# EAGLE board untitled (EAGLE 9.4.2)
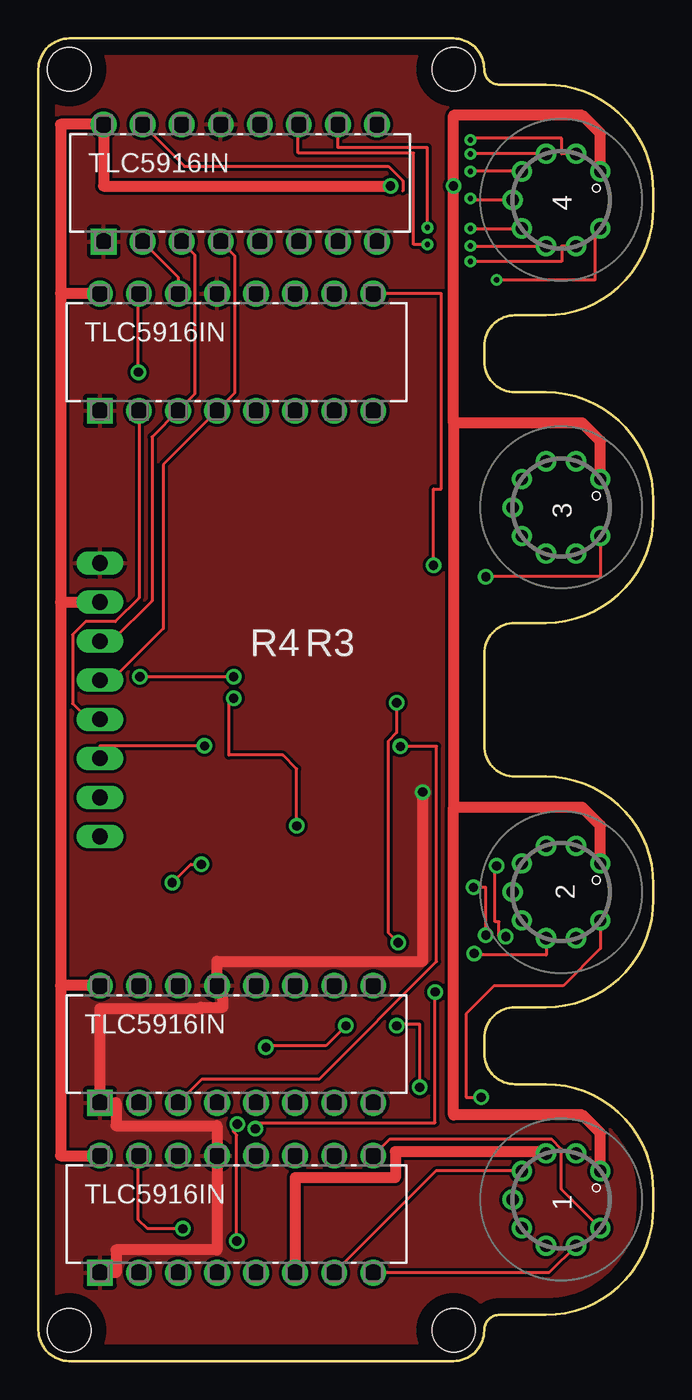
[diagram p0: board, top side]
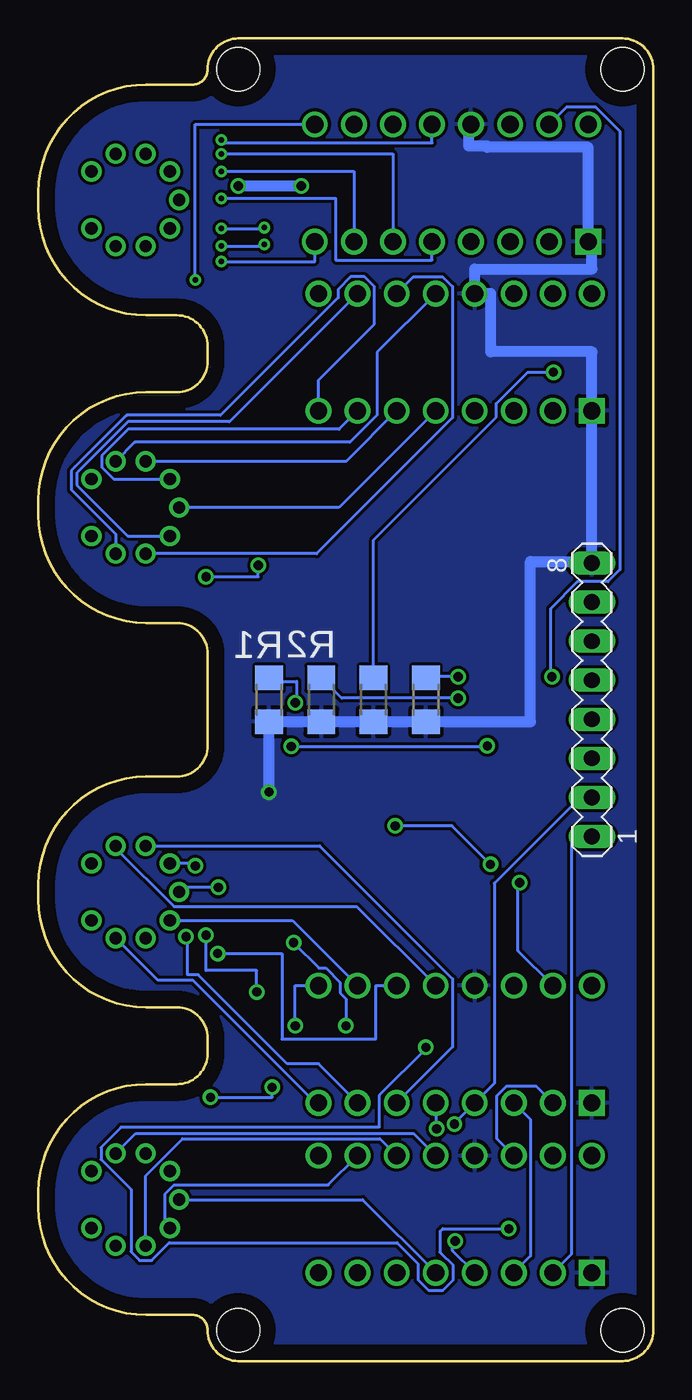
[diagram p1: board, bottom side, seen from below]

Size 40 x 86 mm. Coordinates in mm from the lower left corner, seen from the top.
Outline: 33,83 arc-90 40,76 40,75 arc-90 33,68 31,68 arc90 29,66 29,65 arc90 31,63 33,63 arc-90 40,56 40,55 arc-90 33,48 31,48 arc90 29,46 29,40 arc90 31,38 33,38 arc-90 40,31 40,30 arc-90 33,23 31,23 arc90 29,21 29,20 arc90 31,18 33,18 arc-90 40,11 40,10 arc-90 33,3 30,3 arc90 29,2 arc-90 27,0 2,0 arc-90 0,2 0,84 arc-90 2,86 27,86 arc-90 29,84 arc90 30,83 33,83
Copper layers (1*16): Top 0.035mm / dielectric 1.5mm / Bottom 0.035mm
Design rules "default": minimum track width 6mil, minimum drill 0.35mm, track to track 6mil, track to pad 6mil, pad to pad 6mil, via to via 6mil, smd to smd 6mil, copper to edge 40mil, drill to drill 6mil, minimum pad ring 10mil, minimum via ring 8mil, stop-mask expansion 4mil, vias tented up to drill 0mil, thermal gap 10mil
Net classes: 0 default: width 0.2 mm, drill 0.6 mm, clearance 0.2 mm; 1 other: width 0.2 mm, drill 0.2 mm, clearance 0.1 mm
Holes 2.8 mm at 2,84 27,84 27,2 2,2
tKeepout: area 8.5,52.2 to 8.5,53.4; area 8.5,51.8 to 8.6,53.8; area 8.6,51.6 to 8.6,54; area 8.6,53.2 to 8.6,54.2; area 8.6,51.4 to 8.6,52.5; area 8.6,53.7 to 8.7,54.4; area 8.6,51.3 to 8.7,51.9; area 8.7,53.9 to 8.7,54.4; area 8.7,51.2 to 8.7,51.7; area 8.7,54.1 to 8.8,54.5; area 8.7,51.1 to 8.8,51.5; area 8.8,54.3 to 8.8,54.6; 2068 more areas

## Footprints (pad centres in the part's own frame; a part is rotated, then mirrored left to right if it is on the bottom)
IV-9 = drill 0.8: 1 1.854,-2.552; 2 3,-0.975; 3 3,0.975; 4 1.854,2.552; 5 0,3.154; 6 -1.854,2.552; 7 -3,0.975; 8 -3,-0.975; 9 -1.854,-2.552
DIP254P762X508-16 = drill 1.118 pad 1.676 square: 1 -7.62,17.78 | drill 1.118 pad 1.676: 2 -7.62,15.24; 3 -7.62,12.7; 4 -7.62,10.16; 5 -7.62,7.62; 6 -7.62,5.08; 7 -7.62,2.54; 8 -7.62,0; 9 0,0; 10 0,2.54; 11 0,5.08; 12 0,7.62; 13 0,10.16; 14 0,12.7; 15 0,15.24; 16 0,17.78
R1206 = smd 1.6 x 1.803: 1 -1.422,0; 2 1.422,0
MA08-1 = drill 1.016 long: 1 -8.89,0; 2 -6.35,0; 3 -3.81,0; 4 -1.27,0; 5 1.27,0; 6 3.81,0; 7 6.35,0; 8 8.89,0

## Placement (x,y rotation side)
1  IV-9  [IV-9]  34,10.5 90 top
2  IV-9  [IV-9]  34,30.5 90 top
3  IV-9  [IV-9]  34,55.5 90 top
4  IV-9  [IV-9]  34,75.5 90 top
IC2  TLC5916IN  [DIP254P762X508-16]  21.78,24.41 90 top
IC3  TLC5916IN  [DIP254P762X508-16]  21.78,69.41 90 top
IC4  TLC5916IN  [DIP254P762X508-16]  21.78,13.36 90 top
IC5  TLC5916IN  [DIP254P762X508-16]  22.02,80.41 90 top
R1  1K  [R1206]  25,43 90 bottom
R2  1K  [R1206]  21.6,43 90 bottom
R3  1K  [R1206]  18.2,43 90 bottom
R4  1K  [R1206]  14.8,43 90 bottom
SV1  [MA08-1]  4,43 90 bottom

## Library data of the parts
1-4 = domestichacks
IC2-IC5 = TLC5916IN; DESCRIPTION: 8-CHANNEL CONSTANT-CURRENT LED SINK DRIVERS; HEIGHT: mm; MANUFACTURER_NAME: Texas Instruments; MANUFACTURER_PART_NUMBER: TLC5916IN; MOUSER_PART_NUMBER: 595-TLC5916IN; MOUSER_PRICE-STOCK: https://www.mouser.com/Search/Refine.aspx?Keyword=595-TLC5916IN
R1-R4 = rcl; SPICEPREFIX: R
SV1 = con-lstb; OC_FARNELL: unknown; OC_NEWARK: unknown

## Nets
3.3V: 1.1 2.1 3.1 4.1 IC2.16 IC3.16 IC4.16 IC5.16 SV1.7
CLK1 [other]: IC2.3 IC4.3 SV1.3
CLK2 [other]: IC3.3 IC5.3 SV1.6
GND: IC2.1 IC2.13 IC3.1 IC3.13 IC4.1 IC4.13 IC5.1 IC5.13 R1.1 R2.1 R3.1 R4.1 SV1.8
LE1 [other]: IC2.4 IC4.4 SV1.2
LE2 [other]: IC3.4 IC5.4 SV1.5
N$7 [other]: IC3.14 IC5.2
N$9 [other]: IC2.2 IC4.14
N$13 [other]: 2.8 IC2.8
N$15 [other]: 1.5 IC4.5
N$16 [other]: 1.3 IC4.6
N$17 [other]: 1.4 IC4.7
N$18 [other]: 1.8 IC4.8
N$19 [other]: 1.9 IC4.9
N$20 [other]: 1.6 IC4.10
N$21 [other]: 1.7 IC4.11
N$22 [other]: 3.5 IC3.5
N$23 [other]: 3.3 IC3.6
N$24 [other]: 3.4 IC3.7
N$25 [other]: 3.6 IC3.10
N$26 [other]: 3.7 IC3.11
N$27 [other]: 3.2 IC3.12
N$28 [other]: 4.5 IC5.5
N$29 [other]: 4.3 IC5.6
N$30 [other]: 2.9 IC2.9
N$31 [other]: 3.8 IC3.8
N$32 [other]: 3.9 IC3.9
N$35 [other]: 4.8 IC5.8
N$36 [other]: 4.9 IC5.9
N$66 [other]: 1.2 IC4.12
N$67 [other]: 2.5 IC2.5
N$68 [other]: 2.3 IC2.6
N$69 [other]: 2.4 IC2.7
N$70 [other]: 2.6 IC2.10
N$71 [other]: 2.7 IC2.11
N$72 [other]: 2.2 IC2.12
N$73 [other]: 4.4 IC5.7
N$74 [other]: 4.6 IC5.10
N$75 [other]: 4.7 IC5.11
N$76 [other]: 4.2 IC5.12
R-EXT1: IC4.15 R1.2
R-EXT2: IC2.15 R2.2
R-EXT3: IC3.15 R3.2
R-EXT4: IC5.15 R4.2
SDI1 [other]: IC4.2 SV1.1
SDI2 [other]: IC3.2 SV1.4

## Tracks (layer width: path | path; a pad name or v marks a point on that pad's centre or on a via)
3.3V  (via drill 0.6)
  Top 0.7: IC3.16 1.44,69.41 | 1.44,69.41 1.44,80.41 IC5.16 4.24,76.4 v22.9,76.4 | 1.44,69.41 1.44,49.35 | 1.44,49.35 SV1.7 | 1.44,49.35 1.44,24.41 | IC2.16 1.44,24.41 | 1.44,24.41 1.44,13.36 IC4.16 | 27,61 v27,76.4 27,81 35.38,81 36.55,79.83 4.1 | 27,61 27,36 | 27,36 27,16 35.38,16 36.55,14.83 1.1 | 27,61 35.38,61 36.55,59.83 3.1 | 27,36 35.38,36 36.55,34.83 2.1
  Bottom 0.7: v22.9,76.4 v27,76.4
CLK1  (via drill 0.6)
  Top 0.2: IC2.3 10.61,18.33 18.25,18.33 25.9,25.98 25.9,39.97 v23.55,39.97 | v10.8,40 4,40 SV1.3
  Bottom 0.2: IC2.3 7.99,15.7 7.99,6.83 IC4.3 | v23.55,39.97 10.8,39.97 v10.8,40
CLK2
  Top 0.2: SV1.6 4.76,46.81 7.38,49.43 7.38,60.09 IC3.3 10.17,62.88 10.17,71.94 IC5.3
GND  (via drill 0.6)
  Top 0.7: IC4.1 5.05,5.74 5.05,7.23 11.62,7.23 IC4.13 11.62,15.3 5.05,15.3 5.05,16.79 IC2.1 4,22.92 10.57,22.92 10.57,23 12,23 12,24.41 IC2.13 11.62,26 25,26 v25,37
  Bottom 0.2: R3.1 16.5,41.58 | R4.1 16.1,41.58 | R2.1 19.9,41.58
  Bottom 0.7: v25,37 R1.1 19.9,41.58 16.5,41.58 16.1,41.58 8,41.58 8,52 4,52 SV1.8 IC3.1 4,65.62 10.57,65.62 10.57,69.41 IC3.13 11.62,71 4,71 4,72.79 IC5.1 4.24,78.92 10.81,78.92 10.81,79 12,79 12,80.41 IC5.13
  pour Bottom: 0,0 40,0 40,15 40,45 40,86 0,86
  pour Top: 0,0 40,0 40,17 40,85 arc90 39,86 0,86
LE1  (via drill 0.6)
  Top 0.2: v12.9,7.8 12.9,14.7 12.7,14.9 12.7,15.16 v12.94,15.41
  Bottom 0.2: 13.01,15.41 IC2.4 10.35,18.06 10.35,31.06 4.76,36.65 SV1.2 | IC4.4 13.06,7.18 13.06,7.64 v12.9,7.8 | v12.94,15.41 13.01,15.41 | 13.01,15.41 13.06,15.36
LE2
  Top 0.2: SV1.5 4.76,44.27 8.12,47.63 8.12,58.29 IC3.4 12.76,62.93 12.76,71.89 IC5.4
N$7
  Top 0.2: IC5.2 9.08,70.49 IC3.14
N$9
  Bottom 0.2: IC4.14 10.17,14.45 10.17,17.25 9.53,17.88 7.63,17.88 IC2.2
N$13
  Bottom 0.2: 2.8 32.24,24.77 29.96,24.77 21.98,16.79 IC2.8
N$15
  Bottom 0.2: 1.5 18.92,10.5 IC4.5
N$16
  Top 0.7: 1.3 32.71,13.5 32.71,13.61 23.22,13.61 23.22,11.92 16.7,11.92 IC4.6
N$17
  Top 0.2: 1.4 25.85,12.35 IC4.7
N$18
  Top 0.2: 1.8 33.22,5.74 IC4.8
N$19
  Top 0.2: 1.9 34.03,11.17 34.03,13.78 33.4,14.41 22.83,14.41 IC4.9
N$20
  Bottom 0.2: 1.6 31.75,8.95 31.75,10.88 31.18,11.45 21.15,11.45 IC4.10
N$21
  Bottom 0.2: 1.7 33.02,12.06 30.63,14.45 17.79,14.45 IC4.11
N$22
  Bottom 0.2: IC3.5 20.45,55.5 3.5
N$23
  Bottom 0.2: IC3.6 19.99,58.5 3.3
N$24
  Bottom 0.2: IC3.7 20.44,60.59 34.16,60.59 35.88,58.88 35.88,58.12 35.11,57.35 3.4
N$25
  Bottom 0.2: IC3.10 27.57,61.08 34.18,61.08 37.51,57.75 37.51,56.96 34.19,53.65 3.6
N$26
  Bottom 0.2: IC3.11 15.61,70.5 13.71,70.5 13.07,69.86 13.07,61.34 21.91,52.5 3.7
N$27
  Bottom 0.2: IC3.12 17.97,65.6 17.97,61.52 19.74,59.74 33.73,59.74 3.2
N$28  (via drill 0.35)
  Top 0.2: 4.5 28.1,75.5 v28.1,75.6
  Bottom 0.2: v28.1,75.6 20.67,75.6 20.67,71.6 14.4,71.6 IC5.5
N$29  (via drill 0.35)
  Top 0.2: 4.3 v28.1,78.5 v28.1,78.49
  Bottom 0.2: v28.1,78.49 16.94,78.49 IC5.6
N$30  (via drill 0.6)
  Top 0.2: 2.9 36.55,26.82 34.13,24.4 29.64,24.4 27.81,22.57 27.81,17.15 v28.8,17.15 | v24.8,17.8 24.8,21.9 23.3,21.9 v23.3,21.8
  Bottom 0.2: v28.8,17.15 24.8,17.15 v24.8,17.8 | v23.3,21.8 23.3,24.41 IC2.9
N$31
  Bottom 0.2: IC3.8 21.78,63.8 18.15,67.43 18.15,69.86 18.79,70.5 19.69,70.5 20.51,69.68 20.51,69.14 28.16,61.49 34.26,61.49 37.86,57.9 37.86,56.65 34.98,53.77 3.8
N$32  (via drill 0.6)
  Top 0.2: 3.9 36.55,51 v29.1,51 | v25.7,51.74 25.7,56.7 26.2,56.7 26.2,69.41 IC3.9
  Bottom 0.2: v29.1,51 25.7,51 v25.7,51.74
N$35  (via drill 0.35)
  Top 0.2: 4.8 34.03,72.5 34.03,71.49 v28.1,71.49
  Bottom 0.2: v28.1,71.49 22.02,71.49 IC5.8
N$36  (via drill 0.35)
  Top 0.2: 4.9 36.2,73.65 36.2,70.3 v29.8,70.3
  Bottom 0.2: IC5.9 29.8,80.41 v29.8,70.3
N$66
  Bottom 0.2: 1.2 33.67,14.8 15.6,14.8 IC4.12
N$67  (via drill 0.6)
  Top 0.2: v14.1,15.1 14.1,15.5 25.8,15.5 v25.8,24 | v28.3,30.8 29.1,30.8 v29.1,27.7
  Bottom 0.2: IC2.5 14.16,15.1 v14.1,15.1 | v25.8,24 25.8,25.4 29.1,25.4 v29.1,27.7 | v28.3,30.8 30.85,30.8 2.5
N$68
  Bottom 0.2: 2.3 21.7,33.5 13.07,24.86 13.07,20.42 IC2.6
N$69  (via drill 0.6)
  Top 0.2: v30.4,27.6 29.96,27.6 29.96,28.56 29.7,28.56 29.7,32.2 v29.8,32.2
  Bottom 0.2: IC2.7 21.78,19.33 23.82,19.33 29.6,25.12 30.3,25.12 30.3,27.6 v30.4,27.6 | v29.8,32.2 29.8,32.35 2.4
N$70
  Bottom 0.2: 2.6 23.47,28.65 IC2.10
N$71  (via drill 0.6)
  Top 0.2: 2.7 33.02,26.4 28.34,26.4 v28.34,26.5
  Bottom 0.2: IC2.11 18.05,24.41 18.05,20.94 24.16,20.94 24.16,26.5 v28.34,26.5
N$72
  Bottom 0.2: 2.2 34.98,33.35 31.18,29.55 19.3,29.55 IC2.12
N$73  (via drill 0.35)
  Top 0.2: 4.4 v28.1,77.35
  Bottom 0.2: v28.1,77.35 19.48,77.35 IC5.7
N$74  (via drill 0.35)
  Top 0.2: v25.3,73.7 25.3,78.9 19.48,78.9 IC5.10 | v28.1,73.65 4.6
  Bottom 0.2: v28.1,73.65 25.3,73.65 v25.3,73.7
N$75  (via drill 0.35)
  Top 0.2: v25.3,72.6 24.4,72.6 24.4,78.55 16.9,78.55 16.9,80.41 IC5.11 | v28.1,72.5 4.7
  Bottom 0.2: v28.1,72.5 25.3,72.5 v25.3,72.6
N$76  (via drill 0.35)
  Top 0.2: 4.2 34.03,78.5 34.03,79.51 28.1,79.51 v28.1,79.4
  Bottom 0.2: v28.1,79.4 27.92,79.22 14.4,79.22 IC5.12
R-EXT1  (via drill 0.6)
  Top 0.2: v23.3,42.8 23.3,40.86 22.74,40.3 22.74,27.86 v23.4,27.2 | v20,21.8 18.7,20.5 14.8,20.5 v14.8,20.4 | v9.4,8.6 7.1,8.6 6.5,9.2 6.5,13.32 IC4.15
  Bottom 0.2: R1.2 24.78,44.2 23.2,44.2 23.2,42.8 v23.3,42.8 | v23.4,27.2 21.75,25.55 21.31,25.55 20.38,24.62 20.38,23.94 20,23.56 v20,21.8 | v14.8,20.4 14.8,20.3 17.84,17.27 17.84,15.2 34.62,15.2 35.93,13.89 35.93,13.11 33.98,11.15 33.98,7.11 33.42,6.55 32.63,6.55 31.48,7.69 16.68,7.69 15.3,6.31 15.3,5.27 14.63,4.6 13.69,4.6 13.02,5.27 13.02,6.21 13.86,7.04 | 13.9,7.09 13.86,7.04 | 13.86,7.04 13.86,8.45 13.7,8.6 v9.4,8.6
R-EXT2  (via drill 0.6)
  Top 0.2: v8.7,31.1 9.9,32.3 v10.6,32.3 | v16.8,34.8 16.8,38.5 15.9,39.4 12.4,39.4 12.4,42.8 v12.7,43.1
  Bottom 0.2: IC2.15 8.8,26.67 8.8,31 v8.7,31.1 | v10.6,32.3 13.1,34.8 v16.8,34.8 | v12.7,43.1 20.28,43.1 R2.2
R-EXT3  (via drill 0.6)
  Top 0.2: v6.5,64.3 6.5,69.37 IC3.15
  Bottom 0.2: v6.5,64.3 8.18,64.3 10.22,62.26 10.22,61.38 18.2,53.4 R3.2
R-EXT4  (via drill 0.6)
  Top 0.2: IC5.15 9.51,77.68 22.76,77.68 23.7,76.74 23.7,76.07 | v6.6,44.5 v12.7,44.5
  Bottom 0.2: IC5.15 5.64,81.55 3.77,81.55 2.18,79.96 2.18,51.45 2.95,50.67 4.94,50.67 6.7,48.91 6.7,44.6 v6.6,44.5 | 15.3,44.92 R4.2 14.72,44.5 v12.7,44.5
SDI1
  Bottom 0.2: IC4.2 5.31,6.97 5.31,33.56 5.31,34.11 SV1.1
SDI2
  Top 0.2: IC3.2 6.54,49.63 4.99,48.08 3.07,48.08 2.22,47.23 2.22,42.74 3.24,41.73 SV1.4

## Text on the board
bNames: R1